# EAGLE board diakoptis_ver5 (EAGLE 6.3)
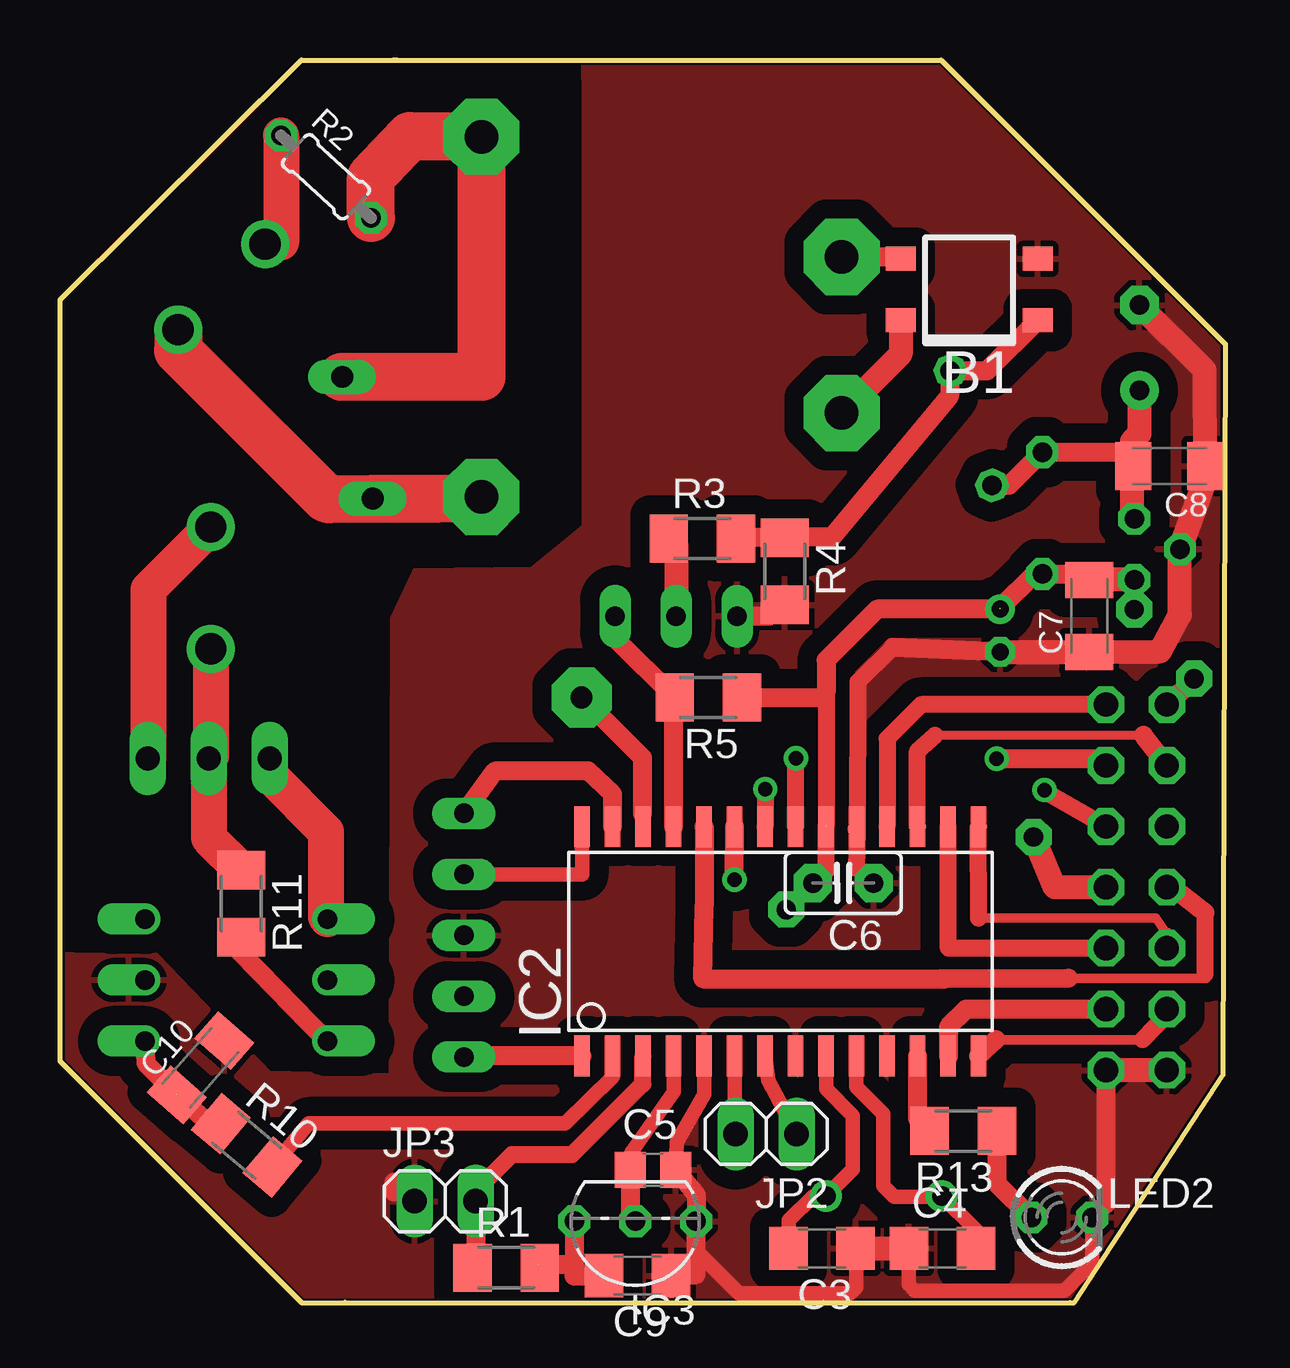
[diagram p0: board, top side]
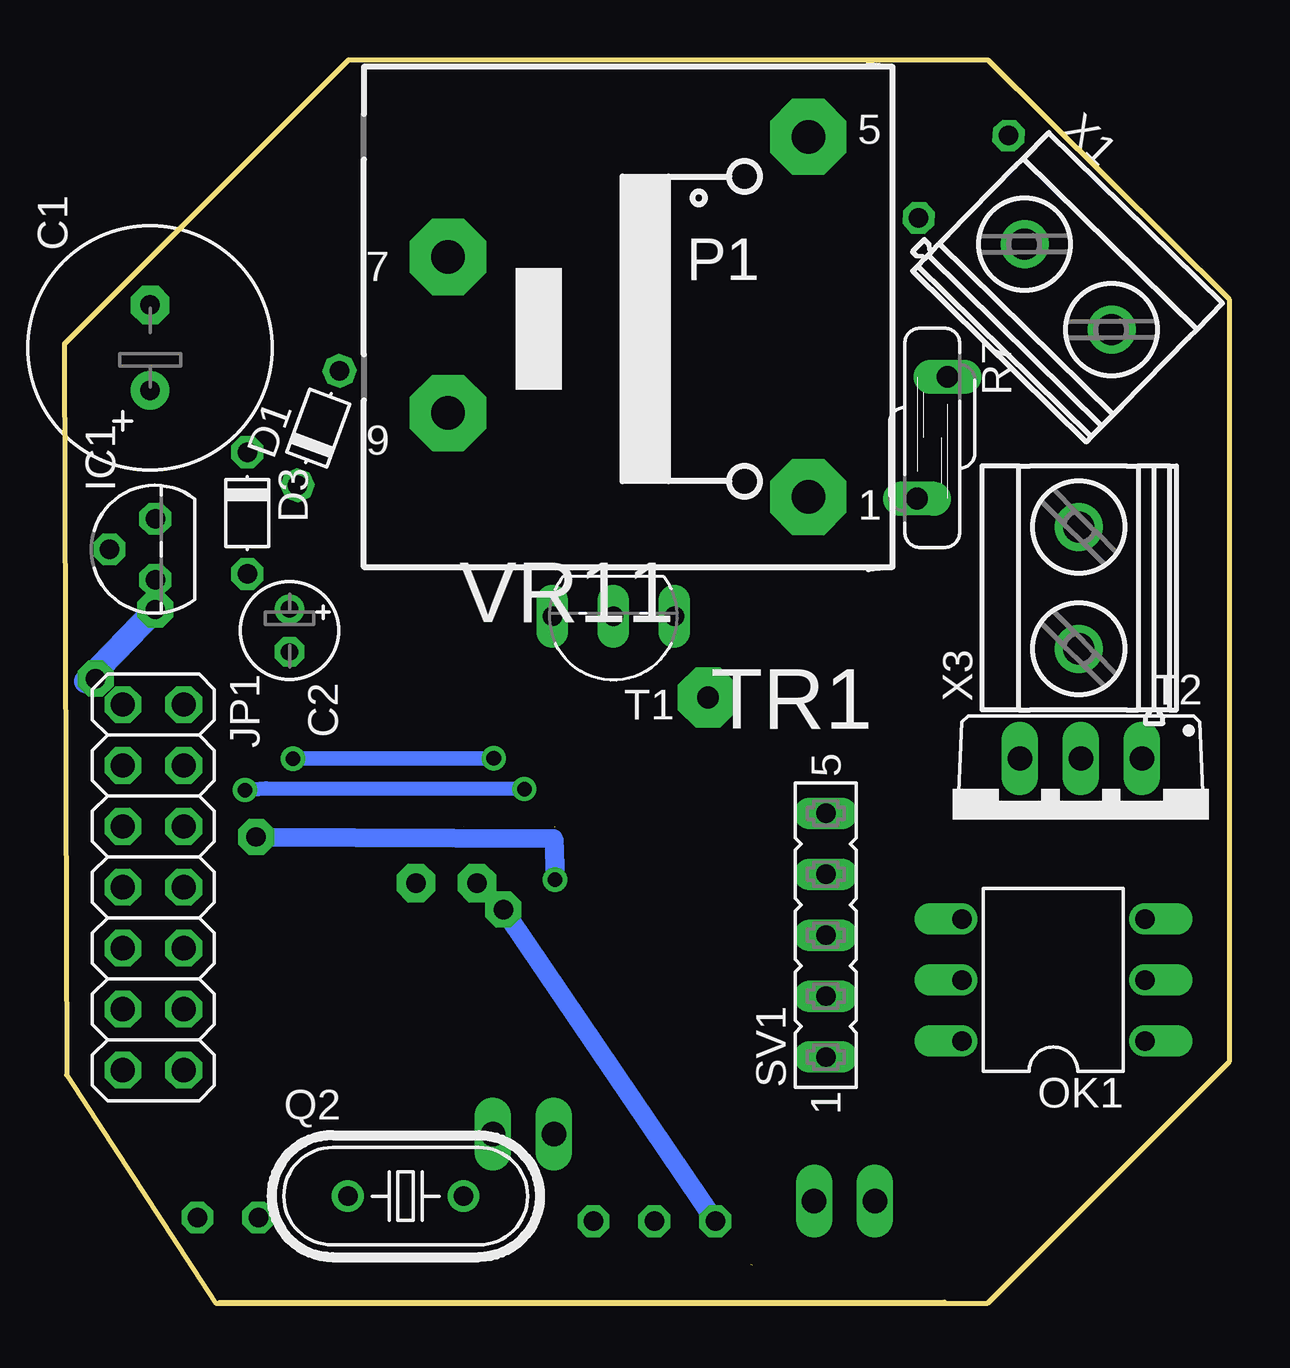
[diagram p1: board, bottom side, seen from below]

Size 48.55 x 51.82 mm. Coordinates in mm from the lower left corner, seen from the top.
Outline: 13.9,51.82 36.72,51.82 48.55,39.98 48.45,9.51 42.24,0 10.09,0 0,10.08 0,41.82 10.06,51.82 13.97,51.82 14.05,51.82
Copper layers (1*16): Top 0.035mm / dielectric 1.5mm / Bottom 0.035mm
Design rules "default": minimum track width 0.8mm, minimum drill 0.8mm, track to track 0.8mm, track to pad 0.8mm, pad to pad 0.8mm, via to via 0.8mm, smd to smd 8mil, copper to edge 0.1mm, drill to drill 0.1mm, minimum pad ring 10mil, minimum via ring 8mil, stop-mask expansion 4mil, vias tented up to drill 0mil, thermal gap 10mil
Milling: 1 lines

## Footprints (pad centres in the part's own frame; a part is rotated, then mirrored left to right if it is on the bottom)
TO-269AA = smd 1 x 1.25: + -1.28,-2.855; - 1.28,-2.855; AC1 -1.28,2.855; AC2 1.28,2.855
E3,5-10 = drill 0.813 pad 1.6: + -1.778,0 | drill 0.813 pad 1.6 octagon: - 1.778,0
E1,8-4 = drill 0.711 pad 1.168: + -0.889,0 | drill 0.711 pad 1.168 octagon: - 0.889,0
C1206 = smd 1.6 x 1.8: 1 -1.4,0; 2 1.4,0
C0805 = smd 1.3 x 1.5: 1 -0.95,0; 2 0.95,0
C2.5-2 = drill 0.813 pad 1.6 octagon: 1 -1.27,0; 2 1.27,0
C1206K = smd 1.5 x 2: 1 -1.5,0; 2 1.5,0
D-5 = drill 0.813 octagon: A 2.54,0; C -2.54,0
TO92 = drill 0.813 octagon: 1 -1.27,0; 2 0,1.905; 3 1.27,0
SO28W = smd 0.65 x 1.7: 1 -7.62,-4.78; 2 -6.35,-4.78; 3 -5.08,-4.78; 4 -3.81,-4.78; 5 -2.54,-4.78; 6 -1.27,-4.78; 7 0,-4.78; 8 1.27,-4.78; 9 2.54,-4.78; 10 3.81,-4.78; 11 5.08,-4.78; 12 6.35,-4.78; 13 7.62,-4.78; 14 8.89,-4.78; 15 8.89,4.78; 16 7.62,4.78; 17 6.35,4.78; 18 5.08,4.78; 19 3.81,4.78; 20 2.54,4.78; 21 1.27,4.78; 22 0,4.78; 23 -1.27,4.78; 24 -2.54,4.78; 25 -3.81,4.78; 26 -5.08,4.78; 27 -6.35,4.78; 28 -7.62,4.78
TO92- = drill 0.813 octagon: 1 -2.54,0; 2 0,0; 3 2.54,0
2X07 = drill 1.016 octagon: 1 -7.62,-1.27; 2 -7.62,1.27; 3 -5.08,-1.27; 4 -5.08,1.27; 5 -2.54,-1.27; 6 -2.54,1.27; 7 0,-1.27; 8 0,1.27; 9 2.54,-1.27; 10 2.54,1.27; 11 5.08,-1.27; 12 5.08,1.27; 13 7.62,-1.27; 14 7.62,1.27
1X02 = drill 1.016 long: 1 -1.27,0; 2 1.27,0
LED3MM = drill 0.813 octagon: A -1.27,0; K 1.27,0
DIL06 = drill 0.813 offset: 1 -2.54,-3.81; 2 0,-3.81; 3 2.54,-3.81; 4 2.54,3.81; 5 0,3.81; 6 -2.54,3.81
HC49U70 = drill 0.813: 1 -2.413,0; 2 2.413,0
M1206 = smd 1.6 x 2: 1 -1.4,0; 2 1.4,0
0204/5 = drill 0.813 octagon: 1 -2.54,0; 2 2.54,0
S07K11 = drill 0.914 long: 1 -0.635,-2.54; 2 0.635,2.54
FE05-1 = drill 0.813 long: 1 -5.08,0; 2 -2.54,0; 3 0,0; 4 2.54,0; 5 5.08,0
TO92-CBE = drill 0.813 long: B 0,0; C -2.54,0; E 2.54,0
TO220BV = drill 1.016 long: G 2.54,-2.54; T1 -2.54,-2.54; T2 0,-2.54
VR11MINI = drill 1.397 pad 3.175 octagon: 1 -10.008,10.008; 5 -10.008,-5.008; 7 5.008,-0.004; 9 5.008,6.504
MKDSN1,5/2-5,08 = drill 1.3 pad 2: 1 -2.561,0.025; 2 2.519,0.025

## Placement (x,y rotation side)
B1  RECTIFIER-S250  [TO-269AA]  37.88,42.25 90 top
C1  680uF  [E3,5-10]  44.98,39.82 90 bottom
C2  20uF  [E1,8-4]  39.17,28.04 270 bottom
C3  22pF  [C1206]  31.75,2.28 180 top
C4  22pF  [C1206]  36.77,2.28 0 top
C5  100nF  [C0805]  24.71,5.56 0 top
C6  100nF  [C2.5-2]  32.64,17.51 180 top
C7  100nF  [C1206K]  42.88,28.65 90 top
C8  100nF  [C1206K]  46.23,34.89 180 top
C9  100nF  [C1206]  24.06,1.15 180 top
C10  100nF  [C1206K]  5.86,9.81 48.7 top
D1  1N4002  [D-5]  37.97,36.48 69.9 bottom
D3  1N4002  [D-5]  40.93,32.93 270 bottom
IC1  78L05Z  [TO92]  44.76,31.42 90 bottom
IC2  PIC16F1938SO  [SO28W]  29.38,15.08 0 top
IC3  DS18B20  [TO92-]  23.97,3.41 180 top
JP1  [2X07]  44.85,17.33 270 bottom
JP2  [1X02]  29.42,7.05 180 top
JP3  [1X02]  16.05,4.25 0 top
LED2  RED  [LED3MM]  41.74,3.57 0 top
OK1  MOC3012M  [DIL06]  7.34,13.47 90 bottom
Q2  [HC49U70]  34.33,4.46 0 bottom
R1  15  [M1206]  18.59,1.48 0 top
R2  [0204/5]  11.08,46.95 317.5 top
R3  10k  [M1206]  26.76,31.87 0 top
R4  1k  [M1206]  30.19,30.51 270 top
R5  1k  [M1206]  27.01,25.25 180 top
R7  S07K11  [S07K11]  12.39,36.07 180 bottom
R10  130  [M1206]  7.77,6.58 320 top
R11  260  [M1206]  7.55,16.65 270 top
R13  120  [M1206]  37.64,7.17 180 top
SV1  [FE05-1]  16.83,15.34 90 bottom
T1  [TO92-CBE]  25.67,28.63 180 bottom
T2  BT138-V  [TO220BV]  6.2,20.16 180 bottom
TR1  [VR11MINI]  27.56,43.61 180 bottom
X1  MKDSN1,5/2-5,08  [MKDSN1,5/2-5,08]  6.73,42.33 315.5 bottom
X3  MKDSN1,5/2-5,08  [MKDSN1,5/2-5,08]  6.26,29.84 90 bottom

## Library data of the parts
B1 = rectifier
C1 C3-C5 C7-C10 = rcl
C2 R1-R5 R10 R11 R13 = resistor
C6 = capacitor-wima
D1 D3 = diode
IC1 = linear
IC2 = microchip; MPN: PIC16F1938-I/SO; OC_FARNELL: 1755828; OC_NEWARK: 08R1948
IC3 = 1wire
JP1-JP3 = pinhead
LED2 = led
OK1 = optocoupler; MF: FAIRCHILD SEMICONDUCTOR; MPN: MOC3012-M; OC_FARNELL: 1021364; OC_NEWARK: 72K8894
Q2 = crystal; OC_FARNELL: unknown; OC_NEWARK: unknown
R7 = varistor
SV1 = con-lsta; OC_FARNELL: unknown; OC_NEWARK: unknown
T1 = transistor
T2 = triac
TR1 = mini_transformer
X1 X3 = con-phoenix-508; MPN: MKDSN 1,5/2-5.08; OC_FARNELL: 1792903; OC_NEWARK: 30M2397

## Nets
GND: B1.- C1.- C2.- C3.1 C4.1 C5.2 C6.1 C7.1 C8.1 C9.1 C10.2 IC1.2 IC2.5 IC2.8 IC2.11 IC2.19 IC3.1 JP1.13 JP1.14 JP3.1 LED2.K OK1.2 R4.2 SV1.3 T1.E
N$1: IC2.3 JP3.2 R1.1
N$2: B1.AC2 TR1.7
N$4: B1.AC1 TR1.9
N$5: B1.+ D1.A R3.2 R4.1
N$6: C1.+ C8.2 D1.C D3.C IC1.3
N$7: R7.2 TR1.1 X1.2
N$8: IC2.13 JP1.12
N$9: R3.1 T1.B
N$10: IC2.18 JP1.2
N$11: C3.2 IC2.9 Q2.2
N$12: C4.2 IC2.10 Q2.1
N$13: IC2.14 JP1.11
N$14: IC2.15 JP1.9
N$15: IC2.21 JP1.4
N$16: IC2.22 JP1.6
N$17: IC2.23 JP1.8
N$19: IC2.24 JP1.7
N$20: IC2.16 JP1.10
N$22: IC2.17 JP1.3
N$23: R2.2 R7.1 TR1.5
N$24: IC2.1 SV1.1
N$25: IC2.2 R10.2
N$26: IC2.25 R5.2 T1.C
N$27: R2.1 X1.1
N$28: C5.1 IC2.4 IC3.2
N$29: IC2.12 R13.2
N$30: IC2.27 SV1.5
N$31: IC2.28 SV1.4
N$36: IC2.6 JP2.2
N$37: IC2.7 JP2.1
N$44: C10.1 OK1.1 R10.1
N$46: OK1.4 T2.G
N$47: OK1.6 R11.2
N$48: R11.1 T2.T2 X3.1
N$49: T2.T1 X3.2
N$53: LED2.A R13.1
VCC: C2.+ C6.2 C7.2 C9.2 D3.A IC1.1 IC2.20 IC3.3 JP1.1 R1.2 R5.1

## Tracks (layer width: path | path; a pad name or v marks a point on that pad's centre or on a via)
GND
  Top 0.5: 33.17,18.14 C6.1
  Top 0.6: IC2.5 26.84,8.69 25.7,6.7 C5.2 | IC3.1 26.5,2.19 28.28,0.41 32.93,0.41 33.17,0.66 33.17,2.26 C3.1 | LED2.K 43.01,1.69 41.84,0.52 35.62,0.52 35.37,0.78 C4.1
  Top 0.7: 34.71,27.33 33.24,25.89 33.22,19.66 | 33.22,19.66 33.17,19.75 | 33.22,19.66 33.17,18.14
  Top 0.8: T1.E 29.55,28.63 R4.2 | C2.- 34.71,27.33 | JP1.14 43.58,4.14 LED2.K | C9.1 26.5,1.19 IC3.1 26.5,4.52 C5.2 | JP3.1 13.92,5.04 13.92,4.64 | 16.3,15.26 SV1.3
  Top 1: JP1.13 JP1.14 | C1.- 47.69,38.89 C8.1 47.73,34.35 IC1.2 46.66,31.36 46.66,28.69 45.84,27.17 C7.1 C2.- | C3.1 | C3.1 C4.1
  pour Top: 43.44,1.21 43.97,2.64 48.23,9.19 48.56,39.98 36.66,51.82 21.81,51.63 21.81,50.37 21.81,32.34 19.66,30.57 14.77,30.52 13.85,28.53 13.77,9.49 13.26,9.48 8.75,9.57 4.02,14.5 0.92,14.5 -0.02,14.55 -0.01,10.09 10.11,-0.02 41.55,0.02 42.24,0
N$1
  Top 0.7: JP3.2 17.22,4.58 18.84,6.2 21.34,6.2 24.28,9.14 24.28,10.29 IC2.3
  Top 0.8: JP3.2 17.31,1.39 17.33,1.31 17.38,1.11 17.37,1.11 17.07,1.52 17.15,1.52 R1.1
N$2
  Top 0.8: TR1.7 34.95,43.61 B1.AC2
N$4
  Top 1: B1.AC1 35.03,39.56 TR1.9
N$5
  Top 0.8: B1.+ 38.62,38.86 D1.A 37.07,37.82 32.16,31.93 30.21,31.93 R4.1 28.2,31.91 R3.2
N$6
  Top 0.8: D1.C 39.55,34.09 D3.C 44.15,35.47 C8.2 | 44.76,35.92 44.76,34.36 44.66,34.26
  Top 1: C1.+ 44.98,36.24 44.66,35.93 44.66,34.26 44.66,32.79 IC1.3 | 44.76,35.92 C8.2
N$7
  Top 0.8: 11.28,33.55 10.58,33.55 10.48,33.65 11.07,33.65 11.21,33.51
  Top 2: 11.21,33.51 R7.2 15.68,33.53 TR1.1 | X1.2 4.92,39.71 11.08,33.55 11.28,33.55
N$8
  Top 0.254: IC2.13
  Top 0.3: 37.01,10.31 IC2.13
  Top 0.8: JP1.12 37.76,12.25 37.01,11.51 37.01,10.31
N$9
  Top 1: R3.1 25.67,31.67 T1.B
N$10
  Top 0.254: 34.46,19.87 IC2.18
  Top 0.7: JP1.2 35.88,24.95 34.46,23.53 34.46,19.87
N$11
  Top 0.254: Q2.2
  Top 0.6: IC2.9 31.92,8.93 33.04,7.81 33.04,5.59 Q2.2 | Q2.2 31.39,4.46 30.37,3.45 30.37,2.3 C3.2
N$12
  Top 0.6: IC2.10 33.19,9.01 34.3,7.9 34.3,4.89 34.75,4.44 36.72,4.44 Q2.1 38.17,3.03 C4.2
N$13
  Top 0.254: JP1.11 46.12,12.01
  Top 0.4: 45.1,10.98 39,10.98
  Top 0.7: 46.12,12.01 45.1,10.98
  Top 0.8: 39,10.98 IC2.14
N$14
  Top 0.4: 46.12,15.39 45.66,16.05 38.28,16.05
  Top 0.5: JP1.9 46.12,15.39
  Top 0.7: 38.28,16.05 IC2.15
N$15  (via drill 0.6, 0.61)
  Top 0.6: JP1.4 43.33,22.68 | 30.65,22.69 v30.66,22.71
  Top 0.7: IC2.21 30.65,22.69
  Top 0.8: 43.33,22.68 v39.03,22.69
  Bottom 0.254: 39.02,22.71 v39.03,22.69
  Bottom 0.6: v30.66,22.71 39.01,22.71 39.02,22.71
N$16  (via drill 0.6)
  Top 0.5: v29.39,21.43 29.39,21.31
  Top 0.6: 41.2,21.22 v41.02,21.39
  Top 0.7: JP1.6 41.2,21.22 | 29.39,21.31 IC2.22
  Bottom 0.6: v29.39,21.43 40.13,21.45 v41.02,21.39
N$17  (via drill 0.61, 0.8 pad 1.5)  (1 unrouted)
  Top 0.8: v28.1,17.66 28.11,19.85 IC2.23
  Top 1: JP1.8 41.45,17.33 v40.56,19.43
  Bottom 0.8: v40.56,19.43 28.16,19.37 v28.1,17.66
N$18  (via drill 0.9 pad 2.5)
  other vias: 21.73,25.24
N$19
  Top 0: 47.71,13.71 47.76,13.54
  Top 0.4: JP1.7 46.36,17.33 | 47.76,13.54 42.03,13.55
  Top 0.7: 47.7,16.28 47.71,13.71
  Top 0.8: 46.36,17.33 47.7,16.28 | IC2.24 26.84,16.55 26.79,13.52 36.65,13.51 | 36.65,13.51 36.85,13.5 | 42.03,13.55 36.65,13.51
N$20
  Top 0.254: IC2.16
  Top 0.7: JP1.10 37.02,14.79 37,18.16 IC2.16
N$21
  Top 0.8: 24.28,20.4 24.28,22.73 21.7,25.3
N$22
  Top 0.4: 36.46,23.68 45.14,23.67
  Top 0.7: IC2.17 35.72,23.01 36.46,23.68
  Top 0.8: 45.14,23.67 JP1.3
N$23
  Top 2: R7.1 17.55,38.61 TR1.5 17.52,48.65 14.58,48.65 12.95,46.92 R2.2
N$24
  Top 0.8: IC2.1 16.42,10.3 SV1.1
N$25
  Top 0.6: IC2.2 23.03,9.44 21.05,7.5 10.37,7.49 R10.2
N$26
  Top 0.8: T1.C 23.13,27.71 25.59,25.26 25.6,25.25 | 25.6,25.25 25.62,25.23 | IC2.25 25.57,25.2 R5.2 25.6,25.25
N$27
  Top 1.5: R2.1 9.21,44.21 X1.1
N$28
  Top 0.254: C5.1 23.76,5.51
  Top 0.6: IC2.4 25.57,8.81 23.82,6.32 23.78,5.53 23.76,5.51
  Top 0.8: 23.76,5.51 23.76,3.69 arc90 IC3.2
N$29
  Top 0.8: IC2.12 35.73,7.68 R13.2
N$30
  Top 0.8: IC2.27 23.03,21.22 22,22.18 18.12,22.17 SV1.5
N$31
  Top 0.6: IC2.28 21.74,19.86 21.75,17.88 19.32,17.88 SV1.4
N$36
  Top 0.254: 28.41,7.23 JP2.2
  Top 0.6: IC2.6 28.11,7.54
  Top 0.8: 28.11,7.54 28.41,7.23
N$37
  Top 0.6: IC2.7 29.52,9.28 JP2.1
N$44  (1 unrouted)
  Top 0.8: OK1.1 3.57,10 C10.1 | C10.1 6.47,7.26 R10.1
N$46
  Top 1.5: T2.G 8.74,21.99 11.08,19.65 11.08,16.08 OK1.4
N$47
  Top 0.254: 11.13,10.89 10.73,10.71 OK1.6
  Top 0.8: R11.2 7.52,14.6 11.13,10.89
N$48
  Top 1.5: X3.1 6.28,22.79 T2.T2 6.2,19.4 R11.1
N$49
  Top 1.5: X3.2 3.68,29.75 3.68,22.73 T2.T1
N$53
  Top 0.8: R13.1 39.04,5 LED2.A
VCC  (via drill 0.8 pad 1.5)  (3 unrouted)
  Top 0.254: 31.39,17.52 C6.2 | 31.92,26.8 31.88,26.8 31.88,26.66
  Top 0.6: JP1.1 46.2,24.99 | v44.77,28.92 IC1.1 | v30.26,16.41 30.61,16.81 31.39,17.51 31.39,17.52
  Top 0.7: 31.92,25.48 31.92,19.89 31.91,19.88 | 31.92,18.06 IC2.20
  Top 0.8: C2.+ 34.05,28.93 31.92,26.8 31.92,25.48 31.7,25.25 R5.1 | 46.2,24.99 v47.25,26.03 | C6.2 31.92,18.06 | R1.2 19.95,1.62 | 39.18,28.97 40.61,30.39 D3.A 42.64,30.39 C7.2 | 21.62,3.29 IC3.3 | IC3.3 21.42,1.6 19.89,1.6 | IC3.3 21.42,1.13 C9.2 22.66,1.13 C9.2
  Top 1: IC1.1 C7.2
  Bottom 0.254: 31.4,17.51 C6.2
  Bottom 0.6: v47.25,26.03 47.65,25.93
  Bottom 0.8: v30.26,16.41 IC3.3
  Bottom 1: 47.65,25.93 v44.77,28.92